# Allegro board PULSE MODULATION.brd
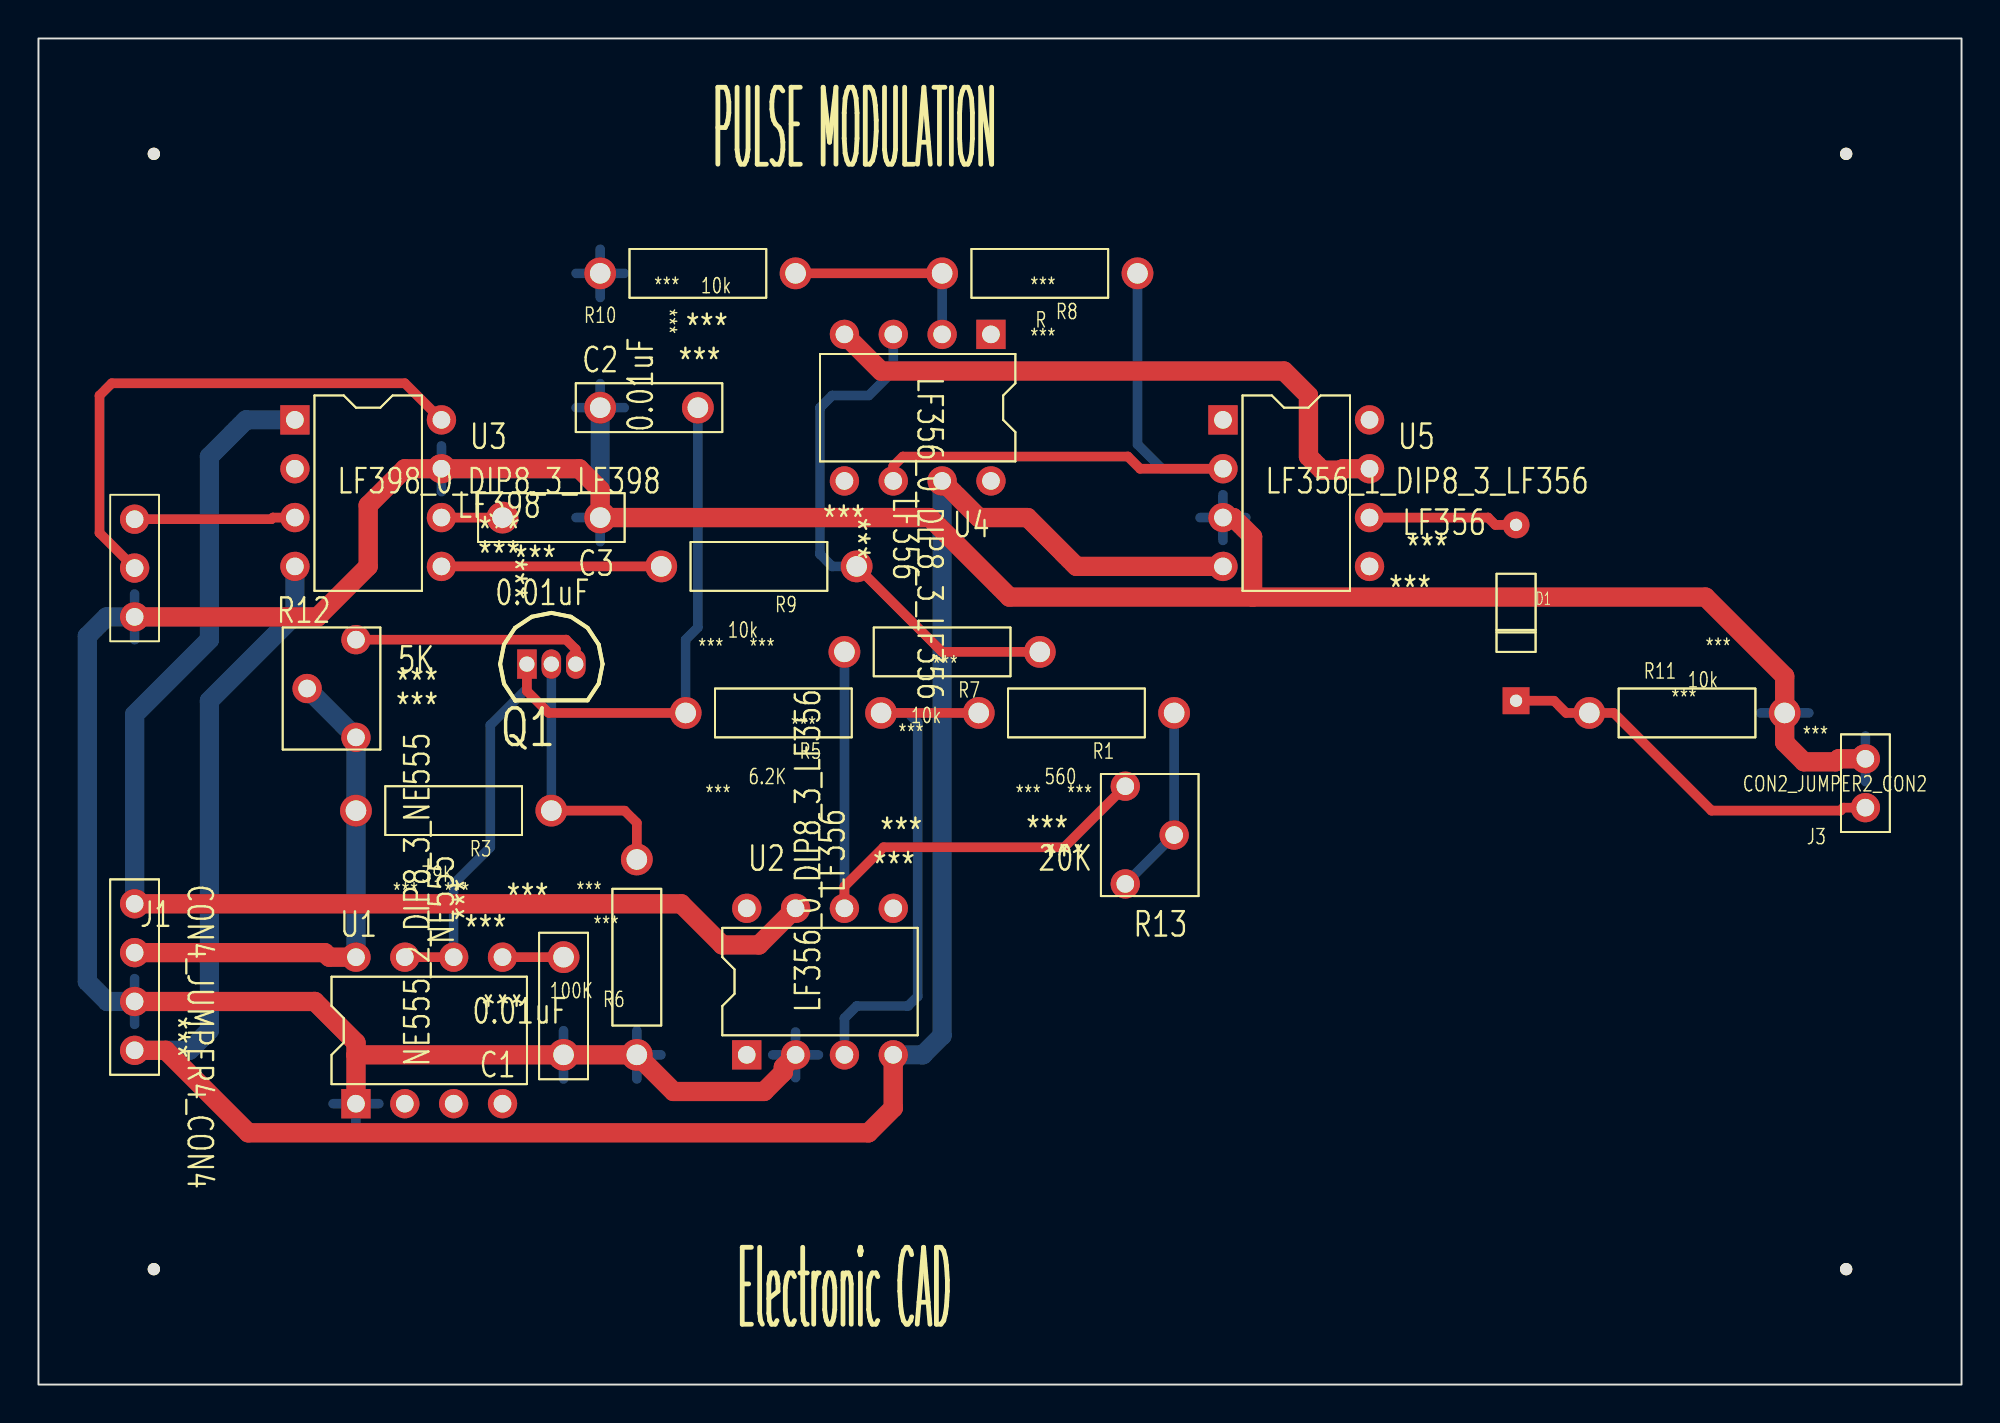
[diagram p0: board, top side]
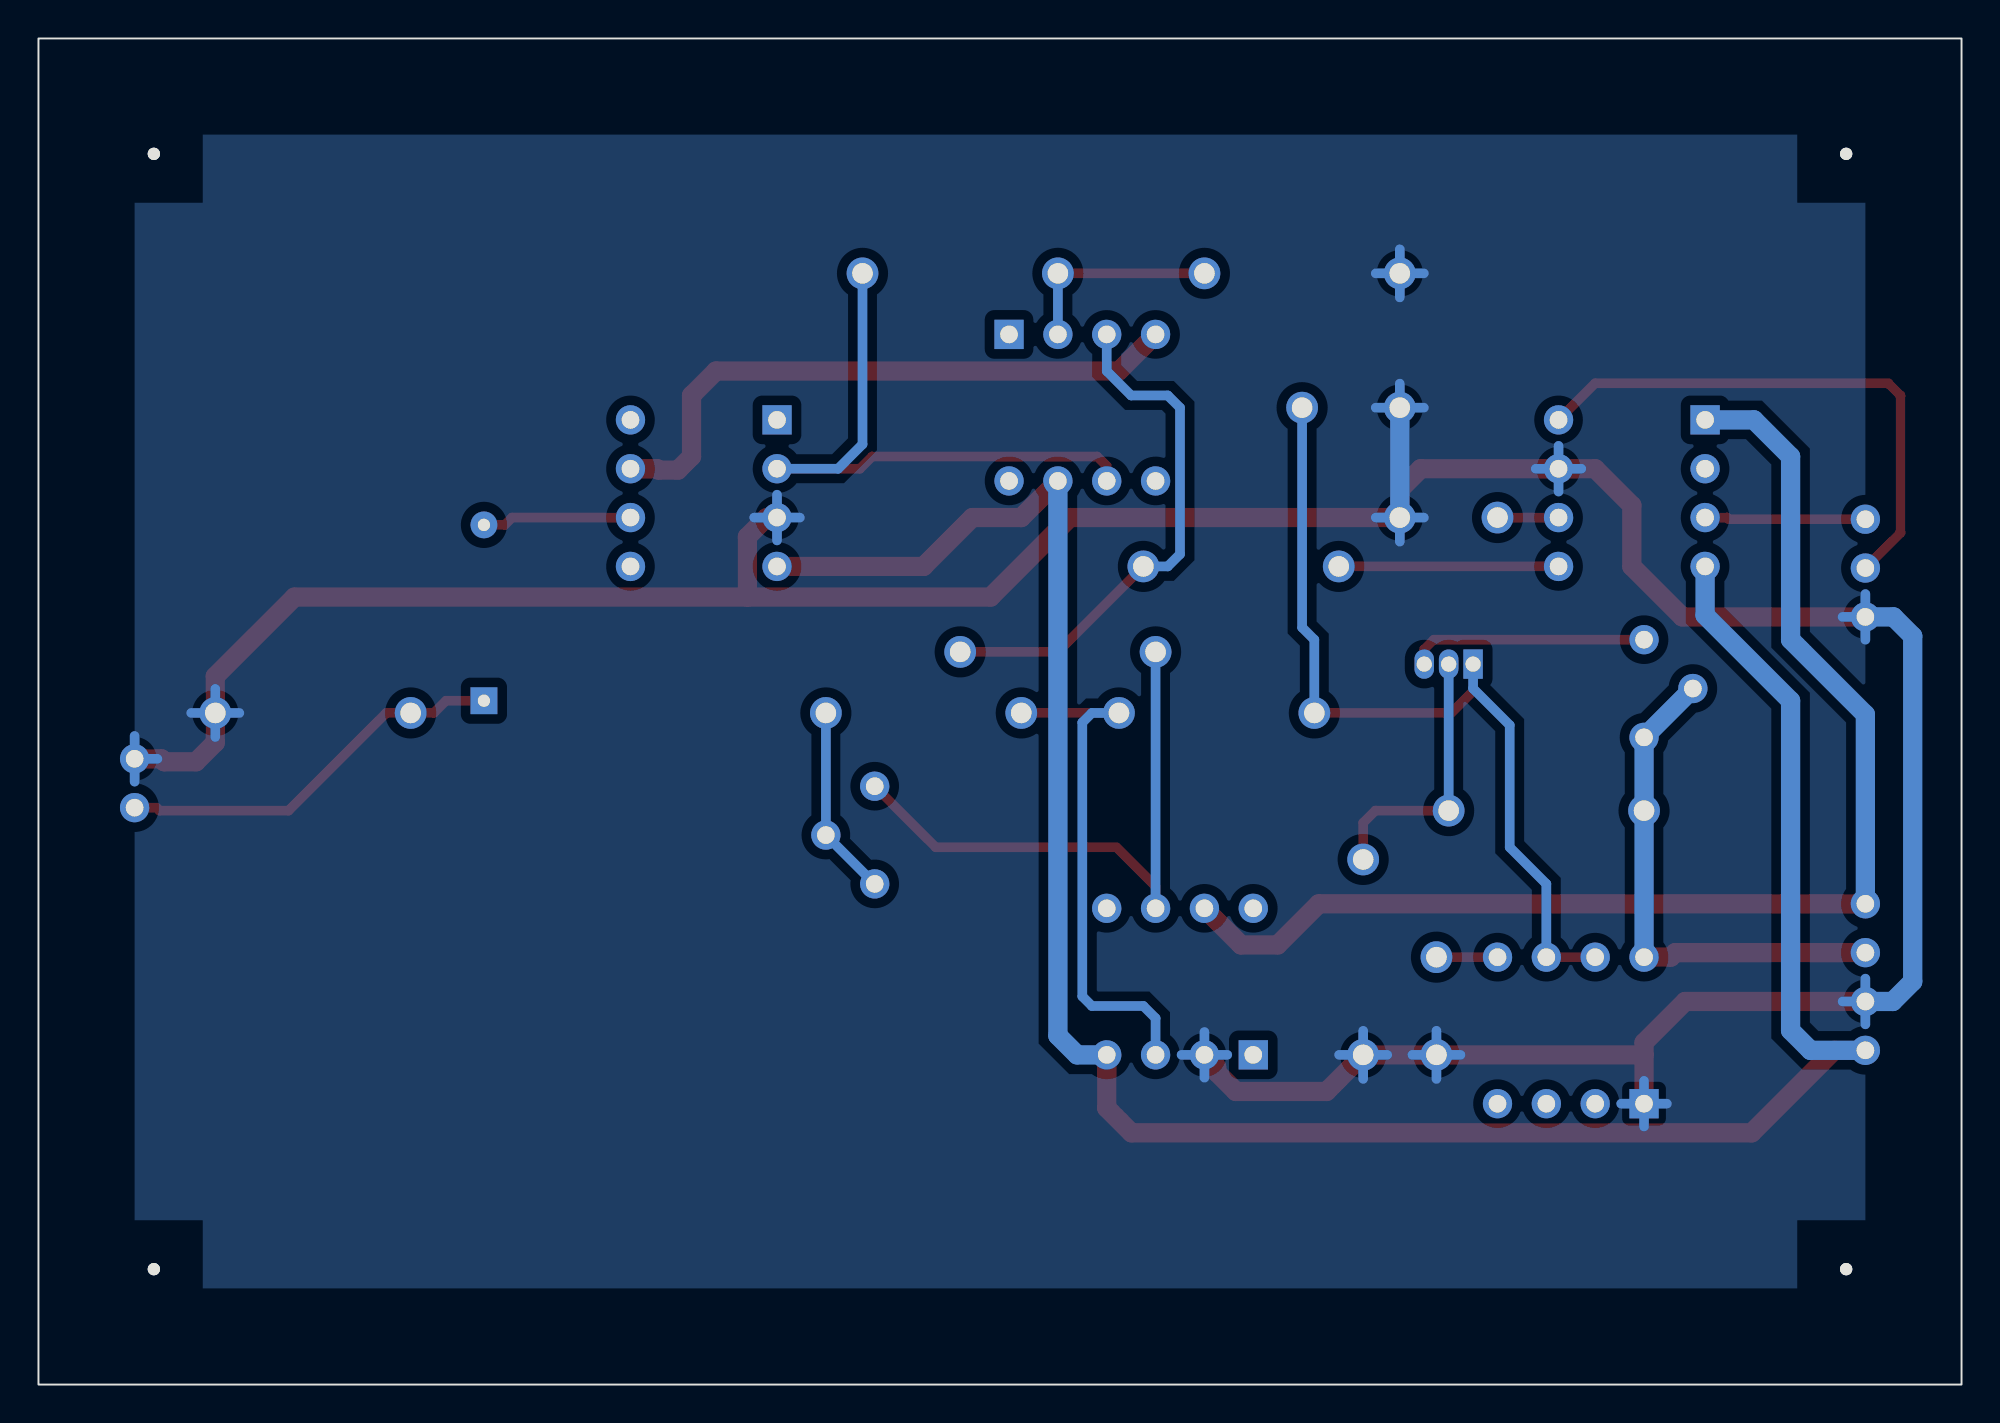
[diagram p1: board, bottom side, seen from below]

Outline 100 x 70 mm; copper layers: TOP, BOTTOM. Coordinates in mm from the lower left corner of the outline.
Outline path: rectangle 0,0 100,70

## Design rules (mm)
constraint set DEFAULT: min track width 0.5
nets with their own width: min track width 1; nets 15V +5V +15V -15V GND

## Placement (name value [footprint] x y rotation side)
C1  0.01uF  [CAPCK06]  27.3 22.23 180 top
C2  0.01uF  [CAPCK06]  34.29 50.8 90 top
C3  0.01uF  [CAPCK06]  24.13 45.09 270 top
D1  1S1588  [DO35]  76.83 35.56 0 top
J1  CON4  [JUMPER4]  5 25 270 top
J2  CON3  [JUMPER3]  5 45 270 top
J3  CON2  [JUMPER2]  95 30 90 top
NOREF  -  [unnamed]  94 6 0 top
NOREF#2  -  [#2]  100 0 90 top
NOREF#3  -  [#2]  0 70 0 top
NOREF#4  -  [unnamed]  6 64 0 top
NOREF#5  -  [unnamed]  94 64 0 top
NOREF#6  -  [unnamed]  6 6 0 top
Q1  PNP CBE  [TO92]  25.4 37.47 0 top
R1  560  [RES400]  48.9 34.92 270 top
R3  39K  [RES400]  16.51 29.84 270 top
R5  6.2K  [RES400]  33.66 34.92 270 top
R6  100K  [RES400]  31.11 27.3 180 top
R7  10k  [RES400]  41.91 38.1 270 top
R8  R  [RES400]  46.99 57.78 270 top
R9  10k  [RES400]  32.38 42.55 270 top
R10  10k  [RES400]  29.21 57.78 270 top
R11  10k  [RES400]  90.81 34.92 90 top
R12  5K  [RESADJ]  16.51 38.73 0 top
R13  20K  [RESADJ]  56.52 26.04 180 top
U1  NE555  [DIP8_3]  16.51 14.61 90 top
U2  LF356  [DIP8_3]  36.83 17.14 90 top
U3  LF398  [DIP8_3]  13.34 50.16 0 top
U4  LF356  [DIP8_3]  49.53 54.61 270 top
U5  LF356  [DIP8_3]  61.59 50.16 0 top

## Library data of the parts
C1-C3 = CAPACITOR NON-POL: Tolerance: ***; User Part Number: ***
D1 = DIODE
J1 = CON4: User Part Number: ***
J2 = CON3: User Part Number: ***
J3 = CON2: User Part Number: ***
Q1 = PNP CBE
R1 R3 R5-R11 = R: Tolerance: ***; User Part Number: ***
R12 R13 = RESISTOR VAR: Tolerance: ***; User Part Number: ***
U1 = NE555_2: Tolerance: ***; User Part Number: ***
U2 U4 = LF356_0: Tolerance: ***; User Part Number: ***
U3 = LF398_0: Tolerance: ***; User Part Number: ***
U5 = LF356_1: Tolerance: ***; User Part Number: ***

## Footprints (pads in the part's own frame, mm; a bottom-side part is the same pattern mirrored in y, then rotated)
CAPCK06
  round 1.651 hole 1.067: 1(0,0) 2(0,5.08)
DIP8_3
  rect 1.524x1.524 hole 0.914: 1(0,0)
  round 1.524 hole 0.914: 2(0,-2.54) 3(0,-5.08) 4(0,-7.62) 5(7.62,-7.62) 6(7.62,-5.08) 7(7.62,-2.54) 8(7.62,0)
DO35
  rect 1.397x1.397 hole 0.635: 1(0,0)
  round 1.397 hole 0.635: 2(0,9.144)
JUMPER2
  round 1.524 hole 0.914: 1(0,0) 2(2.54,0)
JUMPER3
  round 1.524 hole 0.914: 1(0,0) 2(2.54,0) 3(5.08,0)
JUMPER4
  round 1.524 hole 0.914: 1(0,0) 2(2.54,0) 3(5.08,0) 4(7.62,0)
RES400
  round 1.651 hole 1.067: 1(0,0) 2(0,10.16)
RESADJ
  round 1.524 hole 0.914: 1(0,0) 2(-2.54,-2.54) 3(0,-5.08)
TO92
  rect 1.016x1.524 hole 0.787: 1(0,0)
  oval 1.016x1.524 hole 0.787: 2(1.27,0) 3(2.54,0)
unnamed
  round 0.635 hole 3.175 unplated: (0,0)

## Nets
15V: U4.4(V-) U5.7
+5V: J1.2 R3.1 R12.2(WIPER) R12.3 U1.8(VCC)
+15V: J1.1 U2.7 U3.1
-15V: J1.4 U2.4(V-) U3.4(V-) U4.7 U5.4(V-)
GND: C1.2 C2.2 C3.2 J1.3 J2.3 J3.2 R6.2 R10.1 R11.1 U1.1 U2.2 U3.7 U5.3
CLOCK: U1.2
SIG_1: R7.1 R13.3 U2.6
N00711: C2.1 Q1.1 R5.1 U1.6 U1.7
N00868: Q1.3(E) R12.1
N00881: Q1.2 R3.2 R6.1
N00903: C1.1 U1.5
N01141: R1.1 R5.2 U2.3
N01239: R1.2 R13.1 R13.2(WIPER)
N01903: J2.1 U3.3
N01907: J2.2 U3.8
N02056: R7.2 R9.2 U4.3
N02063: R9.1 U3.5
N02793: R8.2 U4.6 U5.2
N02953: R8.1 R10.2 U4.2
N03377: D1.2 U5.6
N03431: D1.1(K) J3.1 R11.2
N06607: C3.1 U3.6

Pads without a net: U1 3 4; U2 1 5 8; U3 2; U4 1 5 8; U5 1 5 8

## Routing (per net, layer and track width the routed paths; a pad name or vN(x,y) marks a point on that pad's centre or on a via; arc(x,y) is an arc through that point)
15V: length 32.1
  TOP w1: U4.4 43.81,52.7 64.77,52.7 66.04,51.44 66.04,48.26 66.75,47.55 67.75,47.55 67.83,47.62 U5.7
+5V: length 26.6
  TOP w1: J1.2 14.88,22.46 15.12,22.23 U1.8
  BOTTOM w1: R12.2 R12.3 R3.1 U1.8
+15V: length 66.2
  TOP w1: J1.1 33.42,25 35.56,22.86 37.47,22.86 U2.7
  BOTTOM w1: J1.1 5,34.84 8.89,38.73 8.89,48.26 10.79,50.16 U3.1
-15V: length 123.1
  TOP w1: U2.4 44.45,14.38 43.16,13.09 10.91,13.09 6.62,17.38 J1.4 ; U5.4 53.98,42.55 51.44,45.09 48.9,45.09 U4.7
  BOTTOM w1: J1.4 7.86,17.38 8.89,18.41 8.89,35.56 13.34,40.01 U3.4 ; U2.4 45.99,17.14 46.99,18.14 U4.7
GND: length 236.2
  TOP w1: 63.13,40.95 50.49,40.95 46.35,45.09 C3.2 29.21,46.54 28.12,47.62 U3.7 19.05,47.62 17.14,45.72 17.14,42.55 14.52,39.92 J2.3 ; 63.13,40.95 86.69,40.95 90.81,36.83 R11.1 90.81,33.38 91.81,32.38 93.45,32.38 93.61,32.54 J3.2 ; 63.13,40.95 63.13,44.09 62.13,45.09 U5.3 ; J1.3 14.37,19.92 16.51,17.78 16.51,17.14 ; 16.51,17.14 U1.1 ; 16.51,17.14 R6.2 33.02,15.24 37.73,15.24 38.73,16.24 38.73,16.51 U2.2
  BOTTOM w0.5: 29.21,56.53 R10.1 ; R10.1 27.96,57.78 ; R10.1 29.21,59.04 ; R10.1 30.46,57.78 ; U3.7 20.95,48.81 ; U3.7 20.95,46.44 ; U3.7 19.77,47.62 ; U3.7 22.14,47.62 ; 5,18.73 J1.3 ; J1.3 5,21.11 ; J1.3 6.19,19.92 ; 5,38.73 J2.3 ; J2.3 6.19,39.92 ; J2.3 5,41.11 ; 27.3,15.89 27.3,17.14 ; 27.3,17.14 28.56,17.14 ; 27.3,17.14 26.05,17.14 ; 27.3,17.14 27.3,18.4 ; J3.2 95,33.73 ; J3.2 95,31.35 ; J3.2 93.81,32.54 ; U1.1 16.51,15.79 ; U1.1 15.32,14.61 ; U1.1 17.7,14.61 ; U1.1 16.51,13.42 ; 61.59,43.9 U5.3 ; U5.3 61.59,46.27 ; U5.3 60.41,45.09 ; U5.3 62.78,45.09 ; 31.11,15.89 R6.2 ; R6.2 31.11,18.4 ; R6.2 32.37,17.14 ; R6.2 29.86,17.14 ; 27.96,45.09 C3.2 ; C3.2 30.46,45.09 ; C3.2 29.21,43.83 ; 39.37,15.96 U2.2 ; U2.2 40.56,17.14 ; U2.2 38.18,17.14 ; U2.2 39.37,18.33 ; C2.2 30.46,50.8 ; C2.2 27.96,50.8 ; C2.2 29.21,52.05 ; R11.1 92.06,34.92 ; R11.1 90.81,36.18 ; R11.1 89.55,34.92 ; R11.1 90.81,33.67
  BOTTOM w1: C3.2 C2.2 ; J1.3 3.58,19.92 2.54,20.96 2.54,38.92 3.54,39.92 J2.3
SIG_1: length 31.2
  TOP w0.5: U2.6 41.91,25.91 43.95,27.94 53.34,27.94 R13.3
  BOTTOM w0.5: U2.6 R7.1
N00711: length 45.6
  TOP w0.5: U1.7 U1.6 ; R5.1 26.54,34.92 25.4,36.06 Q1.1
  BOTTOM w0.5: R5.1 33.66,38.73 34.29,39.37 C2.1 ; Q1.1 25.4,36.2 23.5,34.29 23.5,27.94 21.59,26.04 U1.6
N00868: length 12.4
  TOP w0.5: Q1.3 27.94,38.23 27.44,38.73 R12.1
N00881: length 14.2
  TOP w0.5: R6.1 31.11,29.21 30.48,29.84 R3.2
  BOTTOM w0.5: R3.2 Q1.2
N00903: length 3.2
  TOP w0.5: C1.1 U1.5
N01141: length 27.6
  TOP w0.5: R5.2 R1.1
  BOTTOM w0.5: U2.3 41.91,19.05 42.54,19.68 45.22,19.68 45.72,20.18 45.72,34.42 45.22,34.92 R5.2
N01239: length 9.9
  BOTTOM w0.5: R1.2 R13.2 R13.1
N01903: length 8.4
  TOP w0.5: U3.3 12.2,45.09 12.11,45 J2.1
N01907: length 28.6
  TOP w0.5: J2.2 3.17,44.28 3.17,51.43 3.81,52.07 19.05,52.07 U3.8
N02056: length 27.7
  TOP w0.5: R9.2 46.99,38.1 R7.2
  BOTTOM w0.5: U4.3 44.45,52.7 43.18,51.44 41.27,51.44 40.64,50.8 40.64,43.18 41.27,42.55 R9.2
N02063: length 11.4
  TOP w0.5: U3.5 R9.1
N02793: length 32.2
  TOP w0.5: U4.6 44.45,47.76 44.95,48.26 56.65,48.26 57.28,47.62 U5.2
  BOTTOM w0.5: U5.2 58.42,47.62 57.15,48.9 R8.2
N02953: length 10.8
  TOP w0.5: R8.1 R10.2
  BOTTOM w0.5: R8.1 U4.2
N03377: length 7.8
  TOP w0.5: U5.6 75.38,45.09 75.76,44.7 D1.2
N03431: length 20.6
  TOP w0.5: D1.1 78.81,35.56 79.44,34.92 81.92,34.92 87,29.84 93.7,29.84 93.86,30 J3.1
N06607: length 3.2
  TOP w0.5: U3.6 C3.1

## Copper pours and planes (outline as drawn; the poured copper is in the pictures)
GND on BOTTOM: 95,5 5,5 5,65 95,65 ; 2 cut-outs

## Text on the board
Ref Des/Silkscreen Top: PULSE MODULATION | Electronic CAD
